# Altium PCB PCB_1.PcbDoc
Units mm, origin at the board's own origin, x right, y up, seen from the top; angles counter-clockwise.
Board outline 60.96 x 53.34 mm, 2 copper layers (Top Layer, Bottom Layer), stack 0.47 mm thick; 47 components, 44 nets, 157 pads, 15 vias.
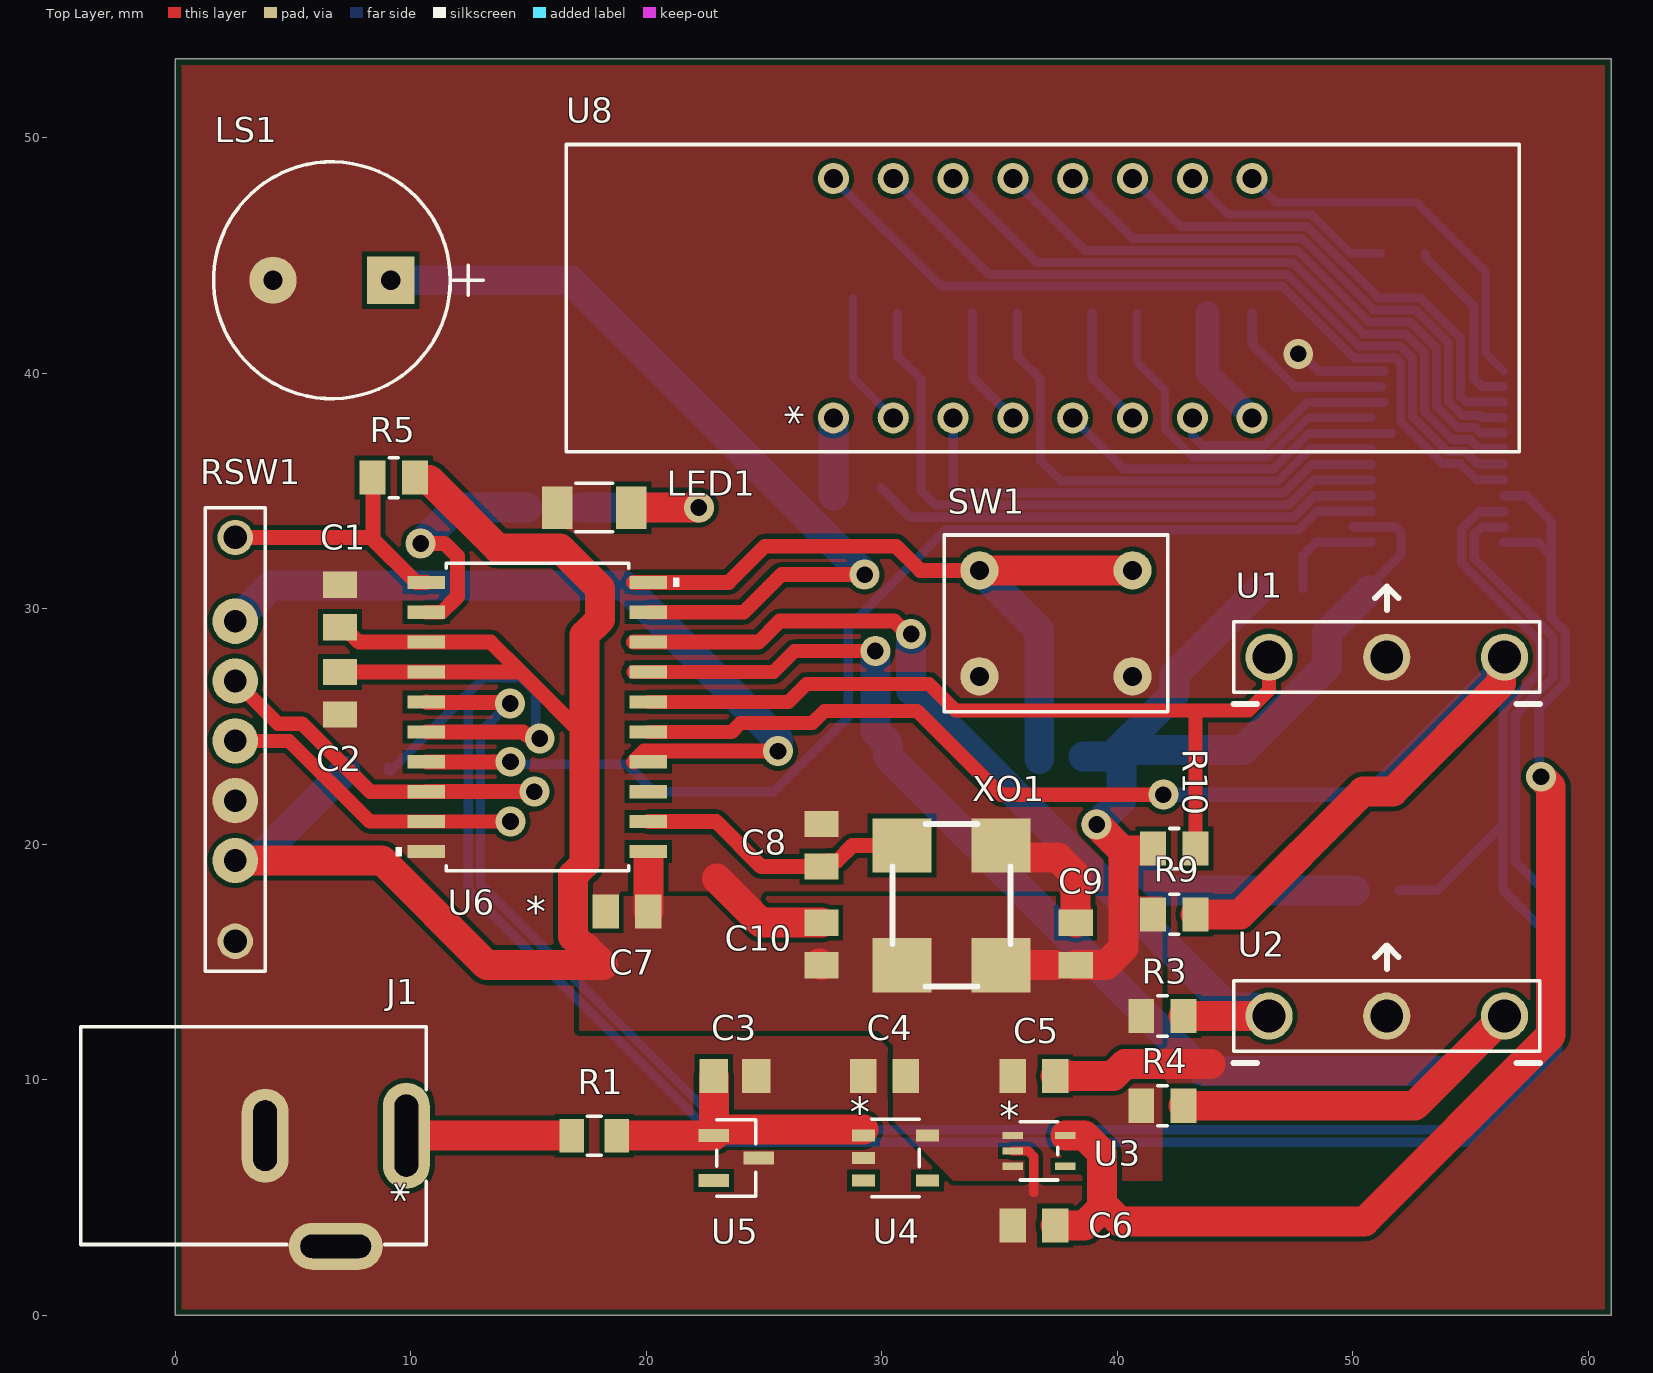
[diagram p0: Top Layer view]
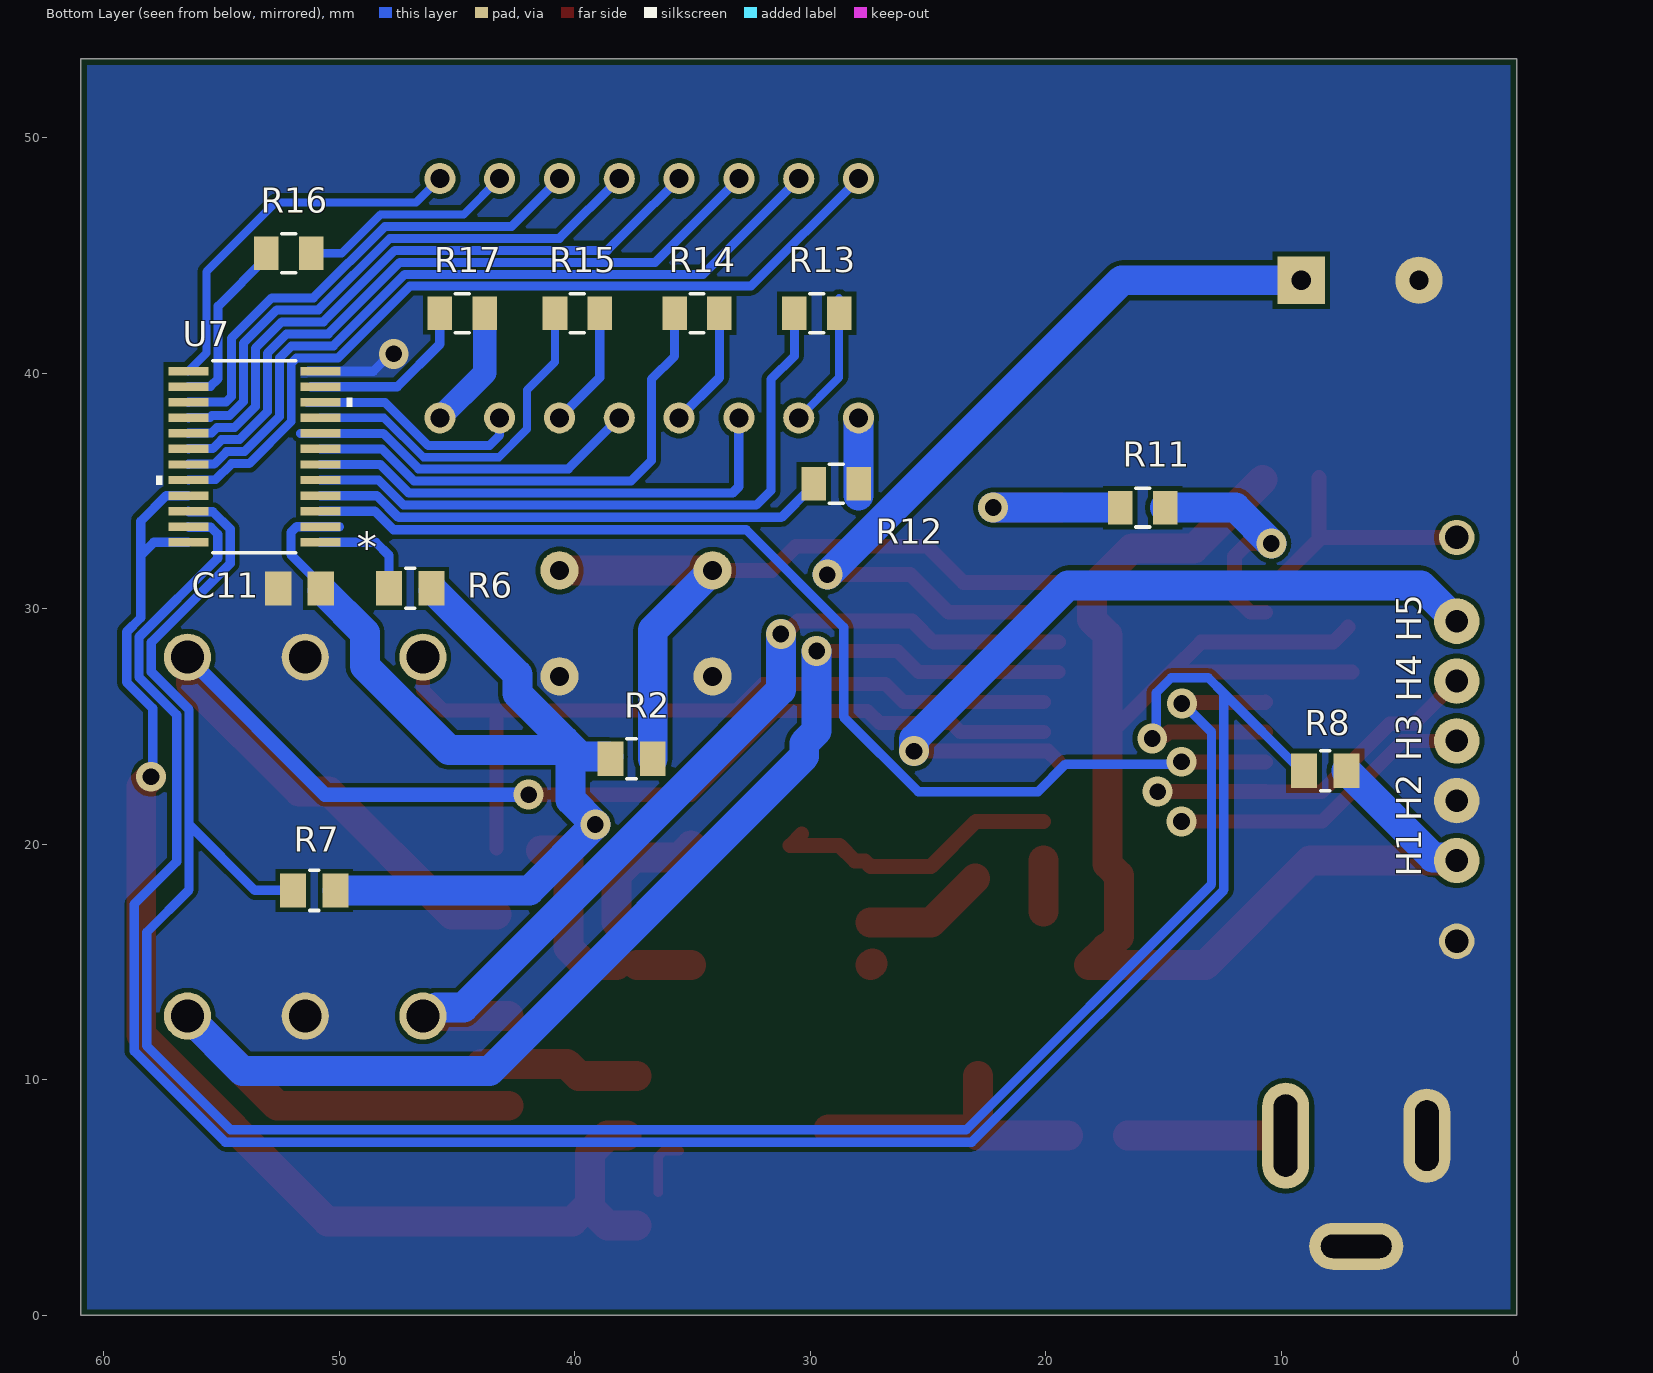
[diagram p1: Bottom Layer view, seen from below]
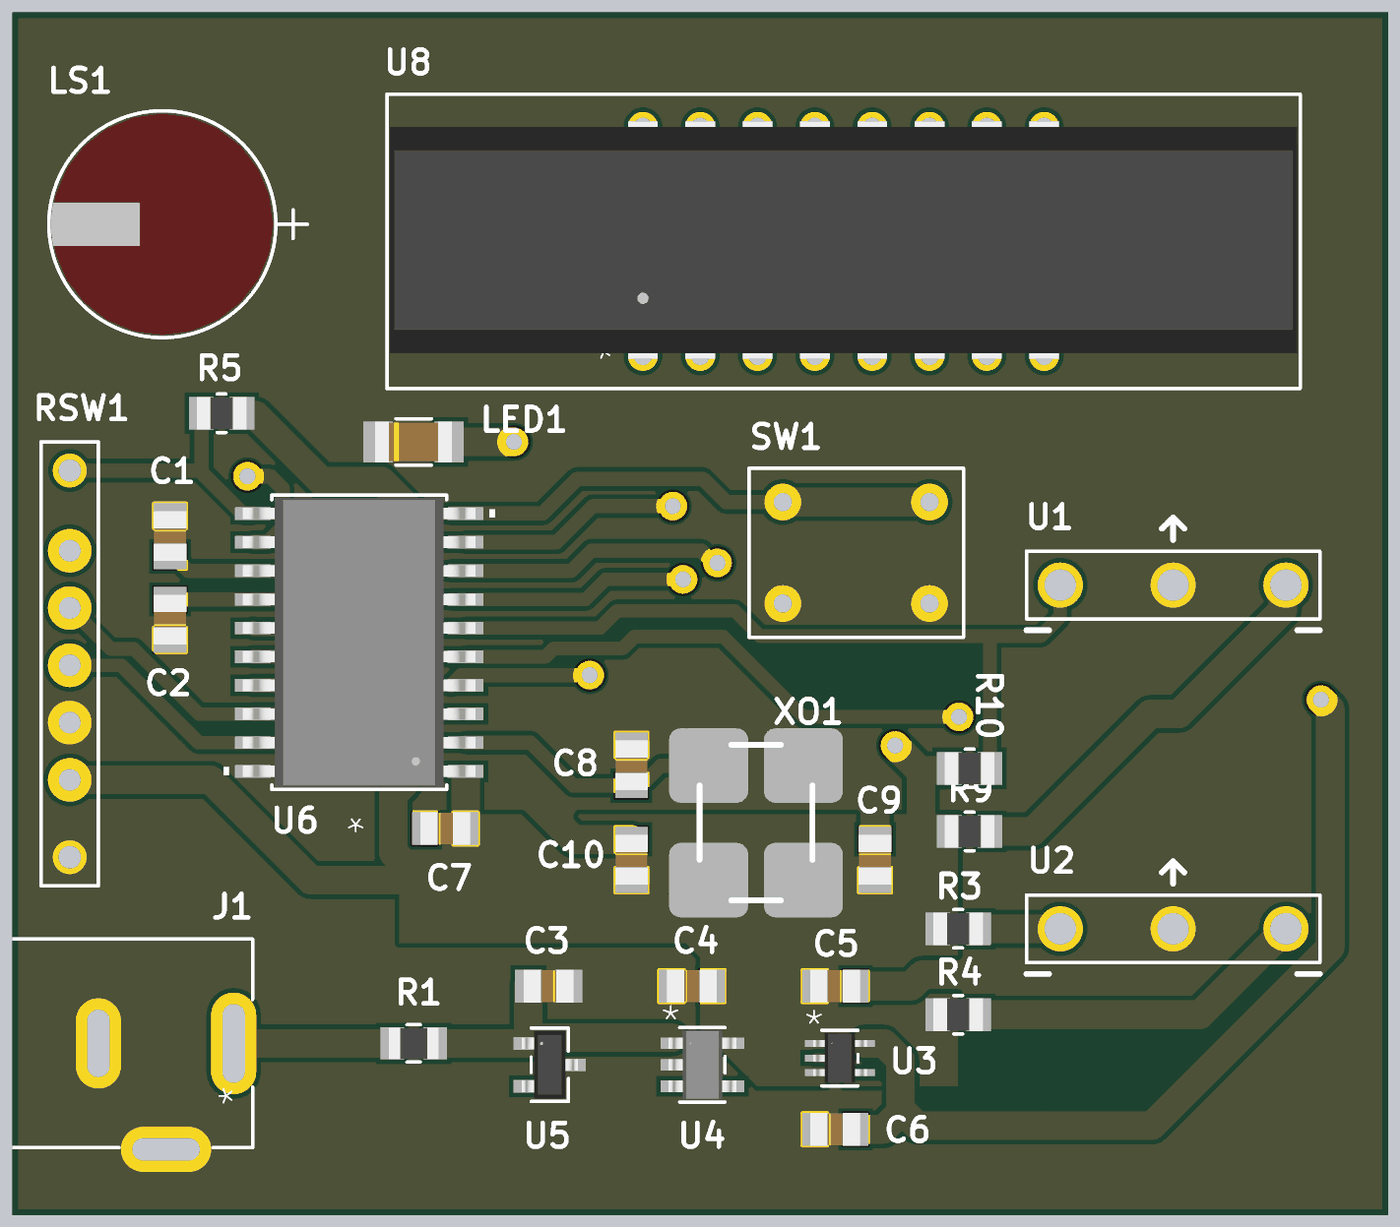
[diagram p2: 3D render of the assembled board from above, using the file's embedded part models]
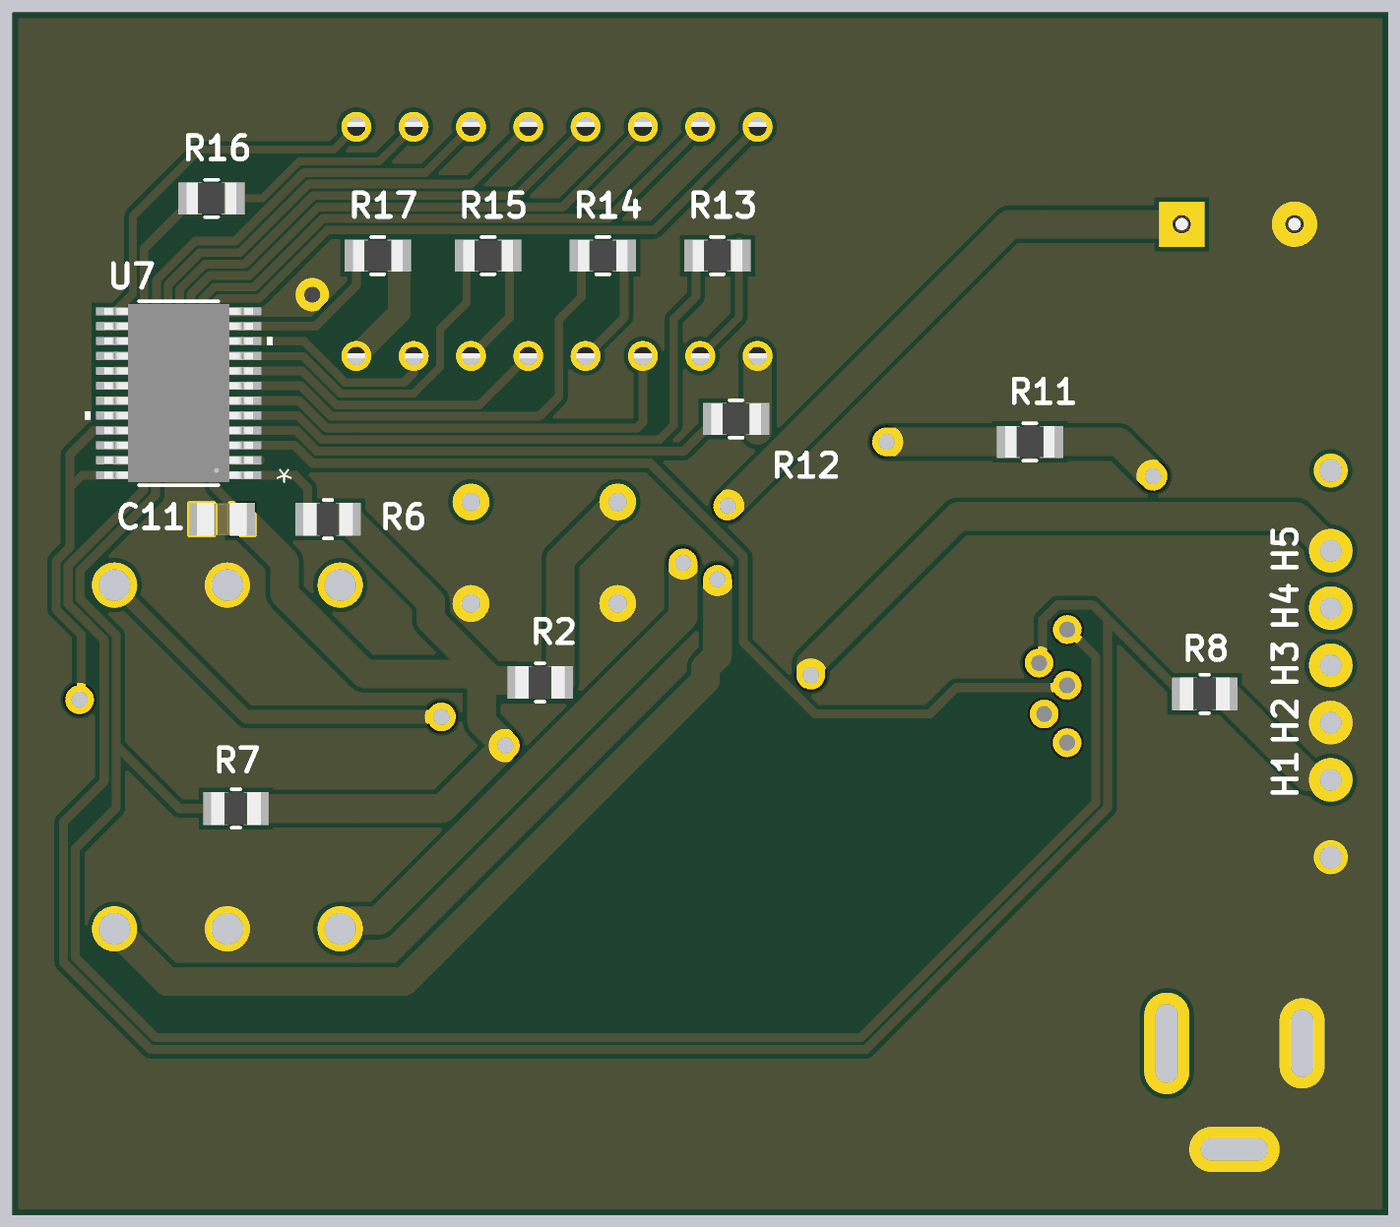
[diagram p3: 3D render of the assembled board from below, using the file's embedded part models]

## Layer stack, top to bottom
Top Solder: solder mask 0.0102, Solder Resist, Dk 3.5
Top Layer: signal copper 0.035
Dielectric 1: dielectric 0.4, FR-4, Dk 4.8
Bottom Layer: signal copper 0.035
Bottom Solder: solder mask 0.0102, Solder Resist, Dk 3.5

## Board outline
0,0 0,53.34 60.96,53.34 60.96,0

## Design rules (kind name [scope] priority, off if disabled: settings)
AssemblyTestpoint [All] p1: testpointundercomponent=TRUE minsize=1.016 maxsize=2.54 preferedsize=1.524 minholesize=0 maxholesize=1.016 preferedholesize=0.813 testpointgrid=0.025 usegrid=TRUE gridoriginx=25.4 gridoriginy=25.4 gridtolerance=0 allowsidetop=TRUE allowsidebottom=TRUE
BoardOutlineClearance [All] p1: gap=0.254 ignorepadtopadclearanceinfootprint=FALSE except(0: Arc-SplitContinuation Track-SplitContinuation SMDPad-SplitContinuation THPad-SplitContinuation Via-SplitContinuation Fill-SplitContinuation Poly-SplitContinuation Region-SplitContinuation Text-SplitContinuation; 0.3: Track-OutlineEdge)
Clearance [All] p1: gap=0.2 ignorepadtopadclearanceinfootprint=TRUE except(0: Text-Text; 0.127: Arc-Arc Arc-Track Arc-Region Track-Track Track-Region SMDPad-SMDPad SMDPad-Region THPad-Region Via-Region Fill-Region Poly-Region Region-Region; 0.15: Arc-Text Track-Text SMDPad-Text THPad-Text Via-Text Fill-Text Poly-Text Region-Text; 0.254: Arc-Via Arc-Hole Track-Via Track-Hole SMDPad-Via SMDPad-Hole THPad-Via THPad-Hole Via-Via Via-Hole Fill-Hole Poly-Hole Region-Hole Text-Hole Hole-Hole; 0.33: Arc-THPad Track-THPad SMDPad-THPad; 0.5: THPad-THPad)
DiffPairsRouting [All] p1: maxlimit=0.5 minlimit=0.127 mostfreqgap=0.254 toplayer_minwidth=0.381 toplayer_maxwidth=0.381 toplayer_prefwidth=0.381 bottomlayer_minwidth=0.381 bottomlayer_maxwidth=0.381 bottomlayer_prefwidth=0.381 maxuncoupledlength=12.7
FabricationTestpoint [All] p1: side=3 testpointundercomponent=TRUE minsize=1.016 maxsize=2.54 preferedsize=1.524 minholesize=0 maxholesize=1.016 preferedholesize=0.813 testpointgrid=0.025 allowsidetop=TRUE allowsidebottom=TRUE usegrid=TRUE gridoriginx=25.4 gridoriginy=25.4 gridtolerance=0
HoleSize "Via Hole Size" [IsVia] p1: absolutevalues=TRUE maxlimit=6.35 minlimit=0.3 maxpercent=80.000 minpercent=20.000
HoleSize [All] p2: absolutevalues=TRUE maxlimit=6.35 minlimit=0.2 maxpercent=80.000 minpercent=20.000
HoleToHoleClearance [All] p1: gap=0.5 allowstackedmicrovias=TRUE
MaximumViaCount [IsBlindVia] p1: limit=0
MinimumAnnularRing [All] p1: minimumring=0.25
PasteMaskExpansion [All] p1: expansion=0.5
PlaneClearance [All] p1: clearance=0.2
PolygonConnect [All] p1: connectstyle=Direct reliefconductorwidth=0.254 reliefentries=4 polygonreliefangle="90 Angle" airgapwidth=0.254
RoutingCorners [All] p1: cornerstyle=45-Degree minsetback=4.08 maxsetback=10
RoutingVias RoutingVias_1 [All] p1: holewidth=0.711 width=1.27 viastyle="Through Hole" minholewidth=0.3 minwidth=0.5 maxholewidth=5 maxwidth=20
RoutingVias [All] p2: holewidth=0.711 width=1.27 viastyle="Through Hole" minholewidth=0.711 minwidth=1.27 maxholewidth=0.711 maxwidth=1.27
SilkToSilkClearance [All] p1: silktosilkclearance=0
SilkToSolderMaskClearance [IsPad] p1: minsilkscreentomaskgap=0.15 clearancetoexposedcopper=TRUE
SolderMaskExpansion [All] p1: expansion=0.102 istentingtop=FALSE
SupplyNets "Schematic Supply Nets_2" [InNet('VDDIO2')] p1: voltage=0.000
SupplyNets "Schematic Supply Nets_1" [InNet('GND')] p2: voltage=0.000
SupplyNets "Schematic Supply Nets" [InNet('+2')] p3: voltage=0.000
ViasUnderSMD [All] p1: allowed=FALSE
Width [All] p1: maxlimit=20 minlimit=0.127 preferedwidth=1.27 minimp=50.000000 maximp=50.000000 favimp=50.000000
20 further rules are at their usual default settings.

## Components (designator, comment, footprint, x,y, rotation, side; value= is the part's Value field where it differs from the comment)
C1 "100nF" 0805_AVX 6.985,30.112 r270 top
C2 "100nF" 0805_AVX 6.985,26.403 r90 top
C3 "4.7uF" CAP_08051A0R8CAT2A_AVX 23.762,10.16 r180 top
C4 "100nF" 0805_AVX 30.112,10.16 r0 top
C5 "100nF" 0805_AVX 36.462,10.16 r180 top
C6 "100nF" 0805_AVX 36.462,3.81 r0 top
C7 "100nF" 0805_AVX 19.177,17.145 r0 top
C8 "100nF" 0805_AVX 27.432,19.952 r270 top
C9 "100nF" 0805_AVX 38.227,15.761 r270 top
C10 "100nF" 0805_AVX 27.432,15.761 r270 top
C11 "100nF" 0805_AVX 51.676,30.861 r180 bottom
H1 "Output" "1 pin header" 2.54,19.304 r90 bottom
H2 "Output" "1 pin header" 2.54,21.844 r90 bottom
H3 "Output" "1 pin header" 2.54,24.384 r90 bottom
H4 "Output" "1 pin header" 2.54,26.924 r90 bottom
H5 "Output" "1 pin header" 2.54,29.464 r90 bottom
J1 "PJ-002A" PJ-002A_CUD 3.315,7.62 r90 top
LED1 "156120VS75300" LED_VS75300_WRE 17.78,34.29 r0 top
LS1 "2.7kHz" CMI-9605IC_CUD 9.144,43.942 r180 top
R1 "100R" 0805_VIS 17.78,7.62 r0 top
R2 "4.7K" RES_1220_SUS 37.579,23.622 r0 bottom
R3 "4.7K" RES_1220_SUS 41.91,8.89 r180 top
R4 "4.7K" RES_1220_SUS 41.91,12.7 r180 top
R5 "4.7K" RES_1220_SUS 9.271,35.56 r0 top
R6 "4.7K" RES_1220_SUS 46.977,30.861 r180 bottom
R7 "4.7K" RES_1220_SUS 51.054,18.034 r180 bottom
R8 "4.7K" RES_1220_SUS 8.128,23.114 r180 bottom
R9 "4.7K" RES_1220_SUS 42.418,17.018 r180 top
R10 "4.7K" RES_1220_SUS 42.418,19.812 r180 top
R11 "100R" 0805_VIS 15.875,34.29 r0 bottom
R12 "100R" 0805_VIS 28.892,35.306 r180 bottom
R13 "100R" 0805_VIS 29.718,42.545 r180 bottom
R14 "100R" 0805_VIS 34.798,42.545 r180 bottom
R15 "100R" 0805_VIS 39.878,42.545 r180 bottom
R16 "100R" 0805_VIS 52.134,45.085 r0 bottom
R17 "100R" 0805_VIS 44.767,42.545 r180 bottom
RSW1 "10-15AT" GP56010-15 2.54,15.875 r90 top
SW1 "TS02-66-160-BK-100-LCR-D" TS02-66-160-BK-100-LCR-D 40.64,31.623 r180 top
U1 "Encoder" 288T232R161A1 56.435,27.94 r180 top
U2 "Encoder" 288T232R161A1 56.435,12.7 r180 top
U3 "2V LDO" SC-70_C5_MCH 36.671,6.97 r0 top
U4 "5V LDO" SOT-23-5-DBV_TEX 30.575,6.67 r0 top
U5 "MMBZ16VAT-QR" SOT_SM712 23.812,6.67 r270 top
U6 "MCU" SOIC20_SO_MCH 15.367,25.4 r180 top
U7 "IO Expander" TSSOP24_4P5X7P9_NXP 53.594,36.449 r0 bottom
U8 "LED Display" TDCG1060M_VIS 36.83,43.18 r90 top
XO1 "64MHz" CB3-3C-64M0000 35.052,14.859 r90 top

## Footprints (in the part's own frame and the unit in brackets; to place one, negate y for a bottom-side part, rotate by r counter-clockwise, add the part's x,y. Pads: shape width x height; smd on the part's side, far side on the other; paste and mask are expansions set on the pad)
"1 pin header" [mil]
  round 76 / inner rect 70.87x78.74 / far side round 76 hole 38 mask+0: 1(0,0)
288T232R161A1 [mm]
  round 2 hole 1.4 mask+0: A(0,0) B(10,0) C(5,0)
  silkscreen extent -1.5,-3 11.5,2
0805_AVX [mil]
  rect 44x57 smd paste+0 mask+3: 1(-35.5,0) 2(35.5,0)
  body extent -44,-29 44,29, height 37
0805_VIS [mil]
  rect 41x56 smd paste+0 mask+0: 1(-37.46,0) 2(37.46,0)
  silkscreen extent -12,-33 12,33, body extent -43,-28 43,28, height 33
CAP_08051A0R8CAT2A_AVX [mil]
  rect 47.24x57 smd paste+0 mask+0: 1(-35.5,0) 2(35.5,0)
  body extent -44,-29 44,29, height 37
CB3-3C-64M0000 [mm]
  rect 2.3x2.5 smd mask+0: 1(0,0) 2(5.08,0) 3(5.08,4.2) 4(0,4.2)
  silkscreen extent -0.9,-0.4 6,4.6
CMI-9605IC_CUD [mil]
  rect 79x79 / inner round 60 / far side rect 79x79 hole 32 paste-99999 mask+0: 1(0,0)
  round 79 / inner round 60 / far side round 79 hole 32 paste-99999 mask+0: 2(196.85,0)
  silkscreen extent -155,-198 296,198, body extent -95,-193 292,193, height 188
GP56010-15 [mm]
  round 1.5 hole 1 mask+0: 1(0,0) 2(17.145,0)
  silkscreen extent -1.27,-1.27 18.41,1.27
LED_VS75300_WRE [mil]
  rect 51.18x71 smd paste+0 mask+0: 1(-62,0) 2(62,0)
  silkscreen extent -31,-40 31,40, body extent -67,-36 67,36, height 55
PJ-002A_CUD [mm]
  oval 4.5x2 hole 1 slot 3.5 at 0 deg paste-2539.97 mask+0: 1(0,-6.49)
  oval 4x2 hole 1 slot 3 at 0 deg paste-2539.97 mask+0: 2(0,-0.495)
  oval 2x4 hole 1 slot 3 at 90 deg paste-2539.97 mask+0: 3(-4.699,-3.492)
  silkscreen extent -4.62,-7.33 4.62,7.33
RES_1220_SUS [mm]
  rect 1.1x1.45 smd paste+0 mask+0: 1(-0.902,0) 2(0.902,0)
  silkscreen extent -0.19,-0.85 0.19,0.85, body extent -1.1,-0.72 1.1,0.72, height 0.7
SC-70_C5_MCH [mil]
  rect 34.5x12 smd paste+0 mask+0: 1(-43.75,25.59) 2(-43.75,0) 3(-43.75,-25.59) 4(43.75,-25.59) 5(43.75,25.59)
  silkscreen extent -32,-48 32,48, body extent -47,-44 47,44, height 43
SOIC20_SO_MCH [mil]
  rect 63x22 smd paste+0 mask+0: 1(-185.5,225) 2(-185.5,175) 3(-185.5,125) 4(-185.5,75) 5(-185.5,25) 6(-185.5,-25) 7(-185.5,-75) 8(-185.5,-125) 9(-185.5,-175) 10(-185.5,-225) 11(185.5,-225) 12(185.5,-175) 13(185.5,-125) 14(185.5,-75) 15(185.5,-25) 16(185.5,25) 17(185.5,75) 18(185.5,125) 19(185.5,175) 20(185.5,225)
  silkscreen extent -237,-257 237,257, body extent -203,-252 203,252, height 104
SOT-23-5-DBV_TEX [mil]
  rect 38.5x20 smd paste+0 mask+0: 1(-53.75,37.4) 2(-53.75,0) 3(-53.75,-37.4) 4(53.75,-37.4) 5(53.75,37.4)
  silkscreen extent -40,-65 40,65, body extent -59,-60 59,60, height 43
SOT_SM712 [mil]
  rect 22x51 smd paste+0 mask+0: 1(-37.4,-37.5) 2(37.4,-37.5) 3(0,37.5)
  silkscreen extent -64,-33 64,33, body extent -59,-49 59,49, height 46
TDCG1060M_VIS [mil]
  round 52 hole 32 paste-99999 mask+0: 1(-200,350) 2(-200,250) 3(-200,150) 4(-200,50) 5(-200,-50) 6(-200,-150) 7(-200,-250) 8(-200,-350) 9(200,-350) 10(200,-250) 11(200,-150) 12(200,-50) 13(200,50) 14(200,150) 15(200,250) 16(200,350)
  silkscreen extent -257,-796 257,796, body extent -205,-791 210,791, height 281
TS02-66-160-BK-100-LCR-D [mil] "Push button"
  round 64 hole 32 mask+0: 1(0,0) 1(255.91,0) 2(0,177.17) 2(255.91,177.17)
  silkscreen extent -59,-59 315,236
TSSOP24_4P5X7P9_NXP [mil]
  rect 67x14 smd paste+0 mask+0: 1(-110.5,143) 2(-110.5,117) 3(-110.5,91) 4(-110.5,65) 5(-110.5,39) 6(-110.5,13) 7(-110.5,-13) 8(-110.5,-39) 9(-110.5,-65) 10(-110.5,-91) 11(-110.5,-117) 12(-110.5,-143) 13(110.5,-143) 14(110.5,-117) 15(110.5,-91) 16(110.5,-65) 17(110.5,-39) 18(110.5,-13) 19(110.5,13) 20(110.5,39) 21(110.5,65) 22(110.5,91) 23(110.5,117) 24(110.5,143)
  silkscreen extent -164,-160 164,160, body extent -130,-156 130,156, height 43

## Part data
C1 C2 C4 C5 C6 C7 C8 C9 C10 C11: library part 08051C103JAT2A, Mfr_Name="KYOCERA AVX"
C3: library part 08053C472K4Z2A, Mfr_Name="KYOCERA AVX"
H1 H2 H3 H4 H5: library part "1 pin header"
J1: "DC power plug", Mfr_Name="CUI Devices", RefDes=RefDes, Type=Type
LED1: "LED", Mfr_Name="Wurth Electronics"
LS1: library part CMI-9605IC-0380T, "Buzzer", Mfr_Name="CUI Devices", RefDes=RefDes, Type=Type
R1 R11 R12 R13 R14 R15 R16 R17: library part RCG080510R0FKEA, Mfr_Name=Vishay
R2 R3 R4 R5 R6 R7 R8 R9 R10: library part RG2012P-472-B-T5, Mfr_Name=Susumu
RSW1: library part GP56010-15, "Reed switch"
SW1: "Push button"
U1 U2: library part 288T232R161A1, "2b Encoder"
U3: library part MIC5365-2.0YC5-TR, Mfr_Name=Microchip, RefDes=RefDes, Type=Type
U4: library part TPS7B92050DBVR, Mfr_Name="Texas Instruments", RefDes=RefDes, Type=Type
U5: "13V TVS", Mfr_Name="Bourns Electronics", RefDes=RefDes, Type=Type
U6: library part PIC18F15Q20T-ISO, "PIC MCU", Mfr_Name=Microchip, RefDes=RefDes, Type=Type
U7: library part PCAL6416APW, "16 I/O expander", Mfr_Name=NXP, RefDes=RefDes, Type=Type
U8: library part TDCR1060M, "4 digit LED display", Mfr_Name=Vishay, RefDes=RefDes, Type=Type
XO1: library part CB3-3C-64M0000, "64MHz Clock"

## Via types
v1: diameter 1.27, hole 0.711, Top Layer to Bottom Layer, 15 vias

## Nets (pads, with @x,y where several pads share a name; then routed paths per layer and width w, separated by ;. In a path a pad name is that pad's centre, name@x,y a point inside that pad or via, vN(x,y) a via of type N, cw(c..) or ccw(c..) an arc to the next point about the centre after c; other vN are vias at no path point)
+2: C6.2 U3.5 U7.21 U7.24 | length 56.6
  Top Layer w1.27: C6.2 38.607,3.81 39.351,4.554 39.351,4.719 ; U3.5 38.607,7.62 39.351,6.876 39.351,4.719 ; v1(57.985,22.86) 58.4,22.445 58.4,11.886 50.489,3.975 40.095,3.975 39.351,4.719
  Bottom Layer w0.4: U7.24 57.861,32.817 58.42,32.258 ; U7.21 57.335,34.798 58.42,33.713 58.42,32.258 ; v1(57.985,22.86) 57.912,22.933 57.912,25.763 59.019,26.87 59.019,29.01 58.42,29.609 58.42,32.258
BUZ: LS1.1 U6.9 | length 35.1
  Top Layer w0.635: U6.9 24.13,29.845 25.726,31.441 v1(29.265,31.441)
  Bottom Layer w1.27: LS1.1 16.764,43.942 v1(29.265,31.441)
ENA1: R9.1 U1.A U6.5 | length 58.8
  Top Layer w0.6: U6.5 23.624,24.765 23.996,25.137 27.042,25.137 27.559,25.654 31.496,25.654 35.052,22.098 v1(41.947,22.098)
  Top Layer w1.27: R9.1 45.212,17.018 50.424,22.23 51.702,22.23 56.295,26.824 56.295,27.8 U1.A
  Bottom Layer w0.6: v1(41.947,22.098) 50.593,22.098 U1.A
ENA2: R3.1 U2.A U6.7 | length 63.2
  Top Layer w0.6: U6.7@19.444,27.305 25.4,27.305 26.289,28.194 v1(29.718,28.194)
  Top Layer w1.27: R3.1 52.625,8.89 U2.A
  Bottom Layer w1.27: v1(29.718,28.194) 29.718,24.81 30.245,24.283 30.245,23.73 43.615,10.36 54.095,10.36 U2.A
ENB1: R10.1 U1.B U6.6 | length 34.8
  Top Layer w0.6: U6.6 26.035,26.035 26.797,26.797 32.004,26.797 33.121,25.68 43.18,25.68 ; R10.1 43.32,25.541 43.18,25.68 ; U1.B 46.431,27.936 46.431,26.543 45.568,25.68 43.561,25.68 43.18,25.68
ENB2: R4.1 U2.B U6.8 | length 39.3
  Top Layer w0.635: U6.8@19.444,28.575 24.765,28.575 25.654,29.464 30.53,29.464 31.07,28.924 v1(31.242,28.924)
  Top Layer w1.27: R4.1 U2.B
  Bottom Layer w1.27: v1(31.242,28.924) 31.242,26.543 44.72,13.065 45.872,13.065 46.237,12.7 U2.B
GND: C1.1 C2.1 C3.1 C4.1 C5.1 C6.1 C7.1 C8.1 C9.1 C10.1 C11.1 H2.1 J1.2 J1.3 LED1.1 LS1.2 RSW1.1 SW1.2 U1.C U2.C U3.2 U4.2 U5.3 U6.20 U7.12 XO1.2 | length 24.2
  Top Layer w0.4: U3.2 36.215,6.97 36.449,6.736 36.449,5.207
  Top Layer w1.27: 22.987,18.542 24.867,16.662 C10.1 ; XO1.2 35.567,19.424 37.472,19.424 38.227,18.669 C9.1 ; C5.1 39.823,10.16 40.331,10.668 43.942,10.668
  Bottom Layer w0.4: v1(47.675,40.817) 47.81,40.817 48.546,40.081 U7.12 U7.12@51.308,40.081
LED1: R11.1 U6.12 | length 10.2
  Top Layer w0.635: v1(10.414,32.766) 11.43,32.766 11.973,32.223 11.973,30.515 11.303,29.845 U6.12
  Bottom Layer w1.27: v1(10.414,32.766) 11.938,34.29 R11.1
NetC3_2: C3.2 R1.2 U4.1 U5.1 | length 12.7
  Top Layer w1.27: R1.2@19.05,7.62 U5.1 U5.1@22.86,7.861 ; C3.2 U5.1@22.86,7.861 ; 29.21,7.874 22.873,7.874 U5.1@22.86,7.861
NetH3_1: H3.1 U6.19 | length 13.1
  Top Layer w0.6: H3.1 4.823,24.384 8.252,20.955 U6.19 v1(14.224,20.955)
NetH4_1: H4.1 U6.18 | length 14.6
  Top Layer w0.6: H4.1 4.353,25.111 5.386,25.111 8.272,22.225 U6.18
  Top Layer w0.635: U6.18 v1(15.24,22.225)
NetH5_1: H5.1 U6.4 | length 33.2
  Top Layer w0.635: U6.4@19.444,23.495 19.896,23.948 v1(25.582,23.948)
  Bottom Layer w1.27: H5.1 4.064,30.988 19.05,30.988 25.582,24.456 v1(25.582,23.948)
NetJ1_1: J1.1 R1.1 | length 6.7
  Top Layer w1.27: J1.1 R1.1@16.51,7.62
NetLED1_2: LED1.2 R11.2 | length 7.9
  Top Layer w1.27: LED1.2 v1(22.225,34.29)
  Bottom Layer w1.27: R11.2@17.196,34.29 v1(22.225,34.29)
NetR6_1: R6.1 U7.1 | length 4.5
  Bottom Layer w0.4: R6.1 47.879,32.258 48.438,32.817 U7.1
NetR12_2: R12.2 U8.1 | length 3.3
  Bottom Layer w1.27: R12.2@27.94,34.798 R12.2 U8.1
NetR13_2: R13.2 U8.2 | length 5.8
  Bottom Layer w0.35: R13.2@28.766,43.18 28.766,39.814 U8.2
NetR14_2: R14.2 U8.4 | length 5.2
  Bottom Layer w0.4: R14.2 33.846,39.814 U8.4
NetR15_2: R15.2 U8.6 | length 5.2
  Bottom Layer w0.4: R15.2 38.926,39.814 U8.6
NetR16_1: R16.1 U8.10 | length 9.3
  Bottom Layer w0.35: U8.10 44.704,46.736 48.235,46.736 49.886,45.085 R16.1
NetR17_2: R17.2 U8.8 | length 5.2
  Bottom Layer w1: R17.2 43.815,40.005 U8.8
PIN1: R12.1 U7.4 | length 21.7
  Bottom Layer w0.4: R12.1@29.972,35.119 31.217,33.874 47.471,33.874 48.395,34.798 U7.4
PIN2: R13.1 U7.5 | length 27.8
  Bottom Layer w0.381: R13.1 30.67,40.72 31.661,39.729 31.661,35.014 32.284,34.391 47.256,34.391 48.324,35.458 U7.5
PIN3: U7.6 U8.3 | length 21.3
  Bottom Layer w0.4: U8.3 33.02,35.179 33.29,34.909 47.042,34.909 48.252,36.119 U7.6
PIN4: R14.1 U7.7 | length 21.6
  Bottom Layer w0.381: R14.1 35.75,40.72 36.741,39.729 36.741,36.284 37.599,35.426 46.828,35.426 48.181,36.779 U7.7
PIN5: U7.8 U8.5 | length 15.1
  Bottom Layer w0.381: U8.5 40.266,35.934 46.617,35.934 48.123,37.44 U7.8 51.638,37.44
PIN6: R15.1 U7.9 | length 15.4
  Bottom Layer w0.35: R15.1 40.83,40.468 42.015,39.283 42.015,37.617 43.205,36.427 46.413,36.427 48.087,38.1 U7.9
PIN7: U7.10 U8.7 | length 9.8
  Bottom Layer w0.381: U8.7 43.18,37.36 43.621,36.919 46.209,36.919 48.05,38.76 U7.10 U7.10@51.333,38.76
PIN8: R17.1 U7.11 | length 7.6
  Bottom Layer w0.4: R17.1 45.718,41.234 47.531,39.421 U7.11 U7.11@51.206,39.421
PIN9: U7.13 U8.9 | length 16.1
  Bottom Layer w0.35: U8.9 46.736,47.244 52.689,47.244 55.626,44.307 55.626,40.856 U7.13
PIN10: R16.2 U7.14 | length 7.6
  Bottom Layer w0.381: R16.2 53.086,44.895 55.133,42.847 55.133,39.767 55.467,39.433 56.388,39.433 U7.14
PIN11: U7.15 U8.11 | length 21.1
  Bottom Layer w0.381: U8.11 42.672,46.228 48.046,46.228 51.085,43.189 52.852,43.189 54.569,41.473 54.569,38.996 54.792,38.773 56.388,38.773 U7.15
PIN12: U7.16 U8.12 | length 24
  Bottom Layer w0.381: U8.12 40.64,45.72 47.836,45.72 50.875,42.681 52.642,42.681 54.061,41.262 54.061,38.786 54.654,38.192 55.403,38.192 55.483,38.113 56.388,38.113 U7.16
PIN13: U7.17 U8.13 | length 26.8
  Bottom Layer w0.381: U8.13 37.719,46.101 38.608,45.212 47.626,45.212 50.664,42.173 52.431,42.173 53.553,41.052 53.553,38.575 54.444,37.684 55.193,37.684 55.425,37.452 56.388,37.452 U7.17
PIN14: U7.18 U8.14 | length 29.6
  Bottom Layer w0.381: U8.14 36.576,44.704 47.415,44.704 50.454,41.665 52.221,41.665 53.045,40.842 53.045,38.365 54.234,37.176 54.982,37.176 55.367,36.792 56.388,36.792 U7.18
PIN15: U7.19 U8.15 | length 32.4
  Bottom Layer w0.381: U8.15 34.544,44.196 47.205,44.196 50.243,41.157 52.01,41.157 52.537,40.631 52.537,38.155 54.023,36.668 54.772,36.668 55.308,36.131 56.388,36.131 U7.19
PIN16: U7.20 U8.16 | length 35.2
  Bottom Layer w0.381: U8.16 32.512,43.688 46.994,43.688 50.033,40.649 51.8,40.649 52.029,40.421 52.029,37.944 53.813,36.16 54.561,36.16 55.25,35.471 56.388,35.471 U7.20
RST: U6.17 U7.3 | length 47.8
  Top Layer w0.635: U6.17 v1(14.224,23.495)
  Bottom Layer w0.4: v1(14.224,23.495) 14.323,23.396 19.149,23.396 20.32,22.225 25.4,22.225 28.575,25.4 28.575,29.21 32.712,33.347 47.689,33.347 48.48,34.138 U7.3
RSW: R5.1 RSW1.2 U6.11 | length 11.5
  Top Layer w0.635: RSW1.2 8.306,33.02 10.211,31.115 U6.11 ; 8.382,32.944 R5.1@8.382,35.56
SCL: R7.1 U6.15 U7.22 | length 95.2
  Top Layer w0.635: U6.15 10.687,26.003 14.183,26.003 v1(14.215,25.971)
  Bottom Layer w0.4: v1(14.215,25.971) 14.16,25.971 12.954,24.765 12.954,18.288 23.368,7.874 54.61,7.874 58.166,11.43 58.166,16.256 56.369,18.053 56.369,20.828 ; R7.1 53.575,18.034 56.369,20.828 ; U7.22 56.379,34.115 55.36,34.115 54.623,33.379 54.623,31.916 57.965,28.574 57.965,27.306 56.369,25.71 56.369,20.828
SDA: R8.1 U6.16 U7.23 | length 101.9
  Top Layer w0.635: U6.16 14.766,24.765 14.925,24.607 15.346,24.607 v1(15.468,24.485)
  Bottom Layer w0.4: R8.1 R8.1@9.03,23.289 ; R8.1@9.144,23.114 12.427,26.397 ; v1(15.468,24.485) 15.303,24.65 15.303,26.423 14.666,27.06 13.09,27.06 12.427,26.397 ; U7.23 56.379,33.455 55.445,33.455 55.15,33.16 55.15,32.134 58.492,28.792 58.492,27.088 56.896,25.492 56.896,19.25 58.693,17.453 58.693,11.212 54.828,7.347 23.133,7.347 12.427,18.053 12.427,26.397
SW1: R2.1 SW1.1 U6.10 | length 31.3
  Top Layer w0.635: U6.10@19.444,31.115 23.495,31.115 25.027,32.647 30.599,32.647 31.623,31.623 SW1.1@34.14,31.623
  Top Layer w1.27: SW1.1@34.14,31.623 SW1.1@40.64,31.623
  Bottom Layer w1.27: SW1.1@34.14,31.623 36.678,29.085 R2.1
VDDIO2: C1.2 C2.2 C4.2 C5.2 C7.2 C9.2 C10.2 C11.2 H1.1 R2.2 R3.2 R4.2 R5.2 R6.2 R7.2 R8.2 R9.2 R10.2 U3.1 U3.3 U4.5 U6.1 U6.13 U6.14 U7.2 XO1.1 XO1.4 | length 129.5
  Top Layer w0.635: C2.2 U6.14 14.66,27.305 ; C1.2@7.15,29.21 7.785,28.575 U6.13 13.39,28.575 14.66,27.305 ; 17.374,24.592 14.66,27.305
  Top Layer w1.27: H1.1 8.776,19.304 13.221,14.859 18.161,14.859 17.434,15.586 17.371,15.586 16.882,16.075 16.882,18.66 17.374,19.152 17.374,24.592 17.374,28.875 18.034,29.535 18.034,30.857 16.338,32.553 13.695,32.553 10.778,35.47 ; C7.2 20.079,19.304 ; C10.2@27.356,14.935 C10.2 ; XO1.1 37.338,14.859 ; C9.2 39.515,14.859 40.259,15.603 40.259,19.685 ; v1(39.116,20.828) 40.259,19.685 ; R10.2@41.431,19.722 40.296,19.722 40.259,19.685
  Bottom Layer w0.4: U7.2@49.987,33.477 U7.2 51.804,33.477 52.038,33.243 52.038,32.29 50.775,31.026 C11.2
  Bottom Layer w1.27: H1.1 2.666,19.43 3.543,19.43 7.136,23.024 7.141,23.024 7.226,23.109 R8.2 ; R2.2@38.566,23.712 39.743,23.712 40.423,24.392 ; R6.2@45.991,30.771 42.418,27.198 42.418,26.387 40.423,24.392 ; R7.2@50.067,18.034 41.91,18.034 v1(39.116,20.828) 40.166,21.878 40.166,23.746 40.423,24.003 ; C11.2@50.698,30.772 48.902,28.976 48.902,27.566 45.339,24.003 40.423,24.003 ; 40.423,24.003 40.423,24.392
XTAL: C8.2 U6.2 XO1.3 | length 12.6
  Top Layer w0.6: XO1.3@30.353,20.438 XO1.3
  Top Layer w0.635: U6.2 22.962,20.955 24.867,19.05 C8.2 27.673,19.291 28.102,19.291 28.75,19.939 XO1.3
pads on no net: U3.4 U4.3 U4.4 U5.2 U6.3

## Polygon pours and split planes (outlines as drawn)
GND on Top Layer "GND_L01_P001" (solid, remove dead copper, pour order 1): 0,53.34 0,0 60.96,0 60.96,53.34
VDDIO2 on Top Layer "VDDIO2_L01_P000" (solid, pour order 0): 17.145,12.065 29.845,12.065 30.48,11.43 30.48,8.255 33.02,5.715 41.91,5.715 41.91,17.78 17.145,17.78
GND on Bottom Layer "GND_L02_P002" (solid, remove dead copper, pour order 2): 0,53.34 60.96,53.34 60.96,0 0,0

## Text inside footprints (layer, text, board x,y; h text height)
J1: Top Overlay "*" at 10.439,4.763 h1.27 r90; Mechanical 13 "*" at 10.439,4.763 h1.27 r90
U3: Top Overlay "*" at 34.989,7.798 h1.27; Mechanical 13 "*" at 35.935,6.706 h1.27
U4: Top Overlay "*" at 28.639,8.001 h1.27; Mechanical 13 "*" at 29.635,6.909 h1.27
U6: Top Overlay "*" at 15.748,18.288 h1.27 r180; Mechanical 13 "*" at 19.05,20.345 h1.27 r180
U7: Mechanical 13 "*" at 51.41,33.846 h1.27 r180; Bottom Overlay "*" at 48.387,33.782 h1.27 r180
U8: Top Overlay "*" at 27.178,37.782 h1.27 r90; Mechanical 13 "*" at 28.575,36.716 h1.27 r90